# EAGLE board board1 (EAGLE 7.5.0)
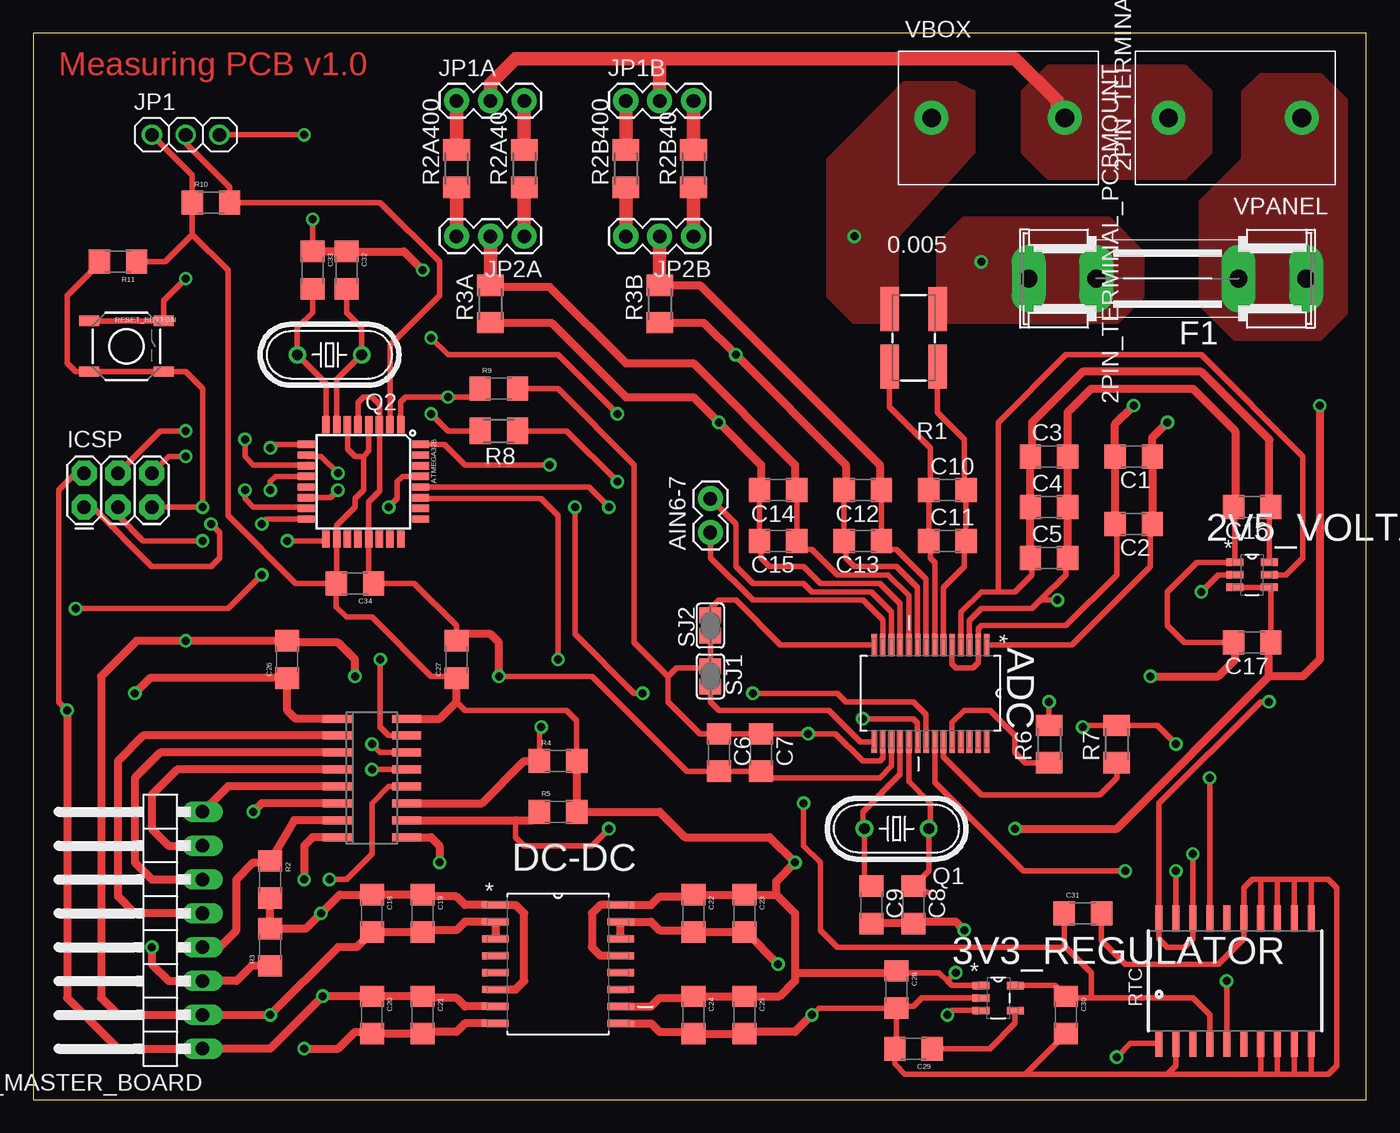
[diagram p0: board, top side]
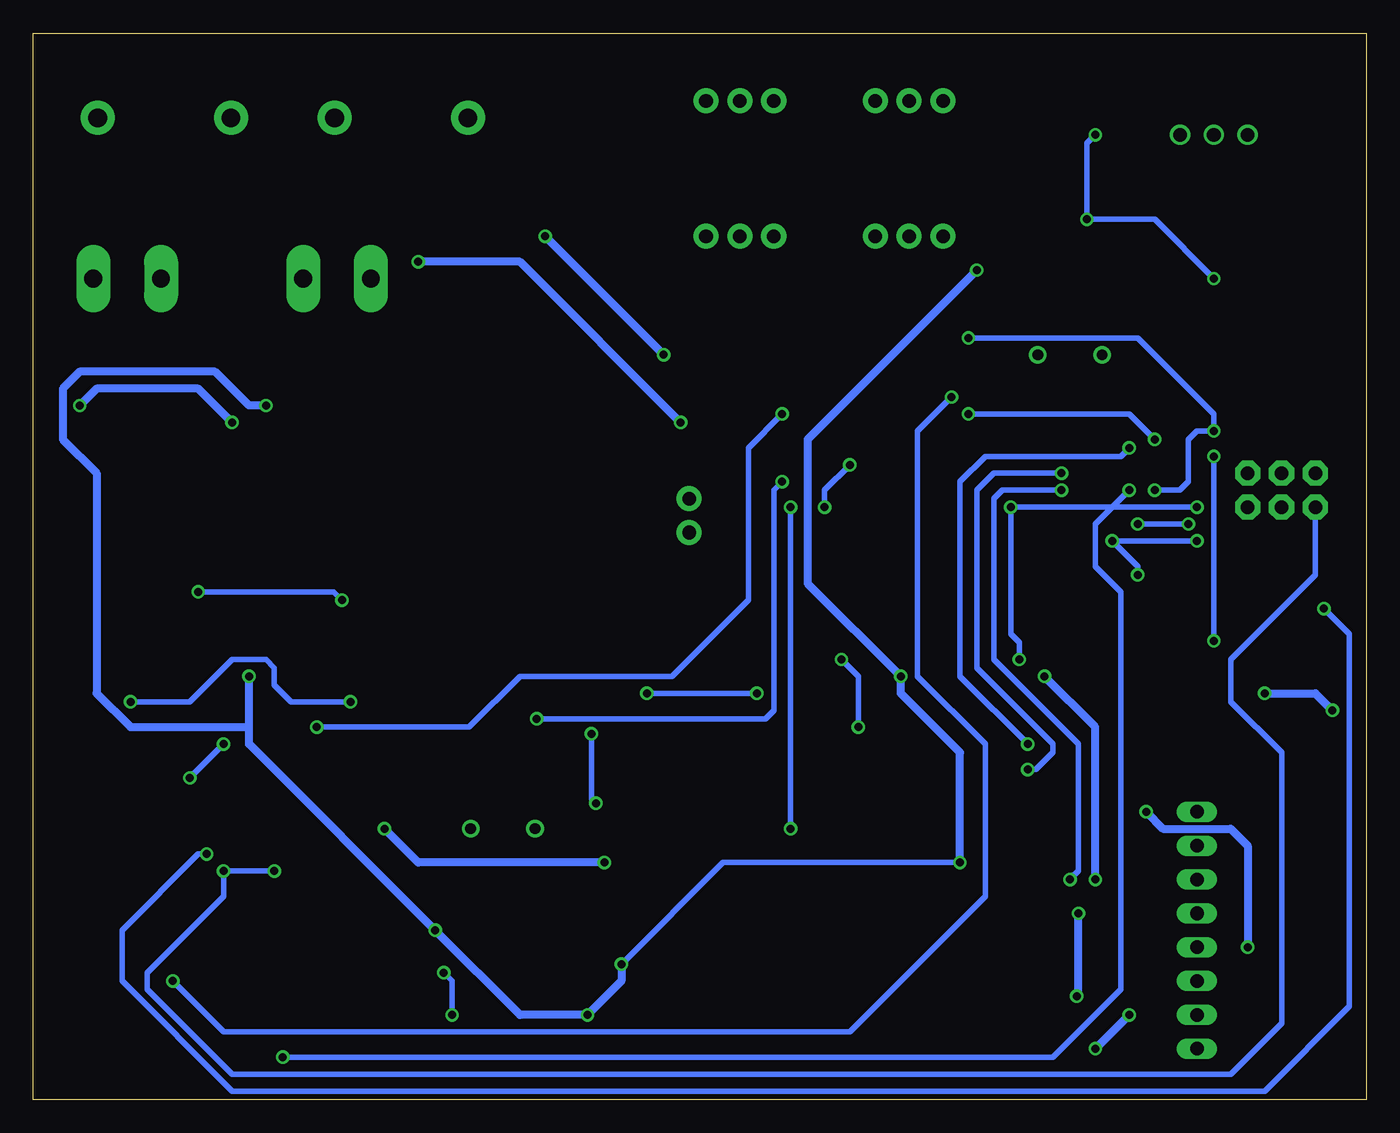
[diagram p1: board, bottom side, seen from below]

Size 100 x 80 mm. Coordinates in mm from the lower left corner, seen from the top.
Outline: 0,0 100,0 100,80 0,80 0,0
Copper layers (1*16): Top 0.035mm / dielectric 1.5mm / Bottom 0.035mm
Design rules "default": minimum track width 10mil, minimum drill 24mil, track to track 8mil, track to pad 8mil, pad to pad 8mil, via to via 8mil, smd to smd 8mil, copper to edge 40mil, drill to drill 8mil, minimum pad ring 10mil, minimum via ring 8mil, stop-mask expansion 4mil, vias tented up to drill 0mil, thermal gap 10mil

## Footprints (pad centres in the part's own frame; a part is rotated, then mirrored left to right if it is on the bottom)
SOT95P280X145-6N = smd 1.27 x 0.559: 1 -1.295,0.94; 2 -1.295,0; 3 -1.295,-0.94; 4 1.295,-0.94; 5 1.295,0; 6 1.295,0.94
SOT95P280X145-5N = smd 1.27 x 0.559: 1 -1.295,0.94; 2 -1.295,0; 3 -1.295,-0.94; 4 1.295,-0.94; 5 1.295,0.94
SOP65P780X200-28N = smd 1.651 x 0.432: 1 -3.632,4.216; 2 -3.632,3.581; 3 -3.632,2.921; 4 -3.632,2.286; 5 -3.632,1.626; 6 -3.632,0.965; 7 -3.632,0.33; 8 -3.632,-0.33; 9 -3.632,-0.965; 10 -3.632,-1.626; 11 -3.632,-2.286; 12 -3.632,-2.921; 13 -3.632,-3.581; 14 -3.632,-4.216; 15 3.632,-4.216; 16 3.632,-3.581; 17 3.632,-2.921; 18 3.632,-2.286; 19 3.632,-1.626; 20 3.632,-0.965; 21 3.632,-0.33; 22 3.632,0.33; 23 3.632,0.965; 24 3.632,1.626; 25 3.632,2.286; 26 3.632,2.921; 27 3.632,3.581; 28 3.632,4.216
1X02 = drill 1.016 pad 1.88: 1 0,0; 2 2.54,0
TQFP32-08 = smd 1.27 x 0.559: 1 -4.293,2.8; 2 -4.293,2; 3 -4.293,1.2; 4 -4.293,0.4; 5 -4.293,-0.4; 6 -4.293,-1.2; 7 -4.293,-2; 8 -4.293,-2.8; 17 4.293,-2.8; 18 4.293,-2; 19 4.293,-1.2; 20 4.293,-0.4; 21 4.293,0.4; 22 4.293,1.2; 23 4.293,2; 24 4.293,2.8 | smd 0.559 x 1.27: 9 -2.8,-4.293; 10 -2,-4.293; 11 -1.2,-4.293; 12 -0.4,-4.293; 13 0.4,-4.293; 14 1.2,-4.293; 15 2,-4.293; 16 2.8,-4.293; 25 2.8,4.293; 26 2,4.293; 27 1.2,4.293; 28 0.4,4.293; 29 -0.4,4.293; 30 -1.2,4.293; 31 -2,4.293; 32 -2.8,4.293
C3216 = smd 1.6 x 1.8: 1 -1.4,0; 2 1.4,0
1206 = smd 1.6 x 1.8: 1 -1.4,0; 2 1.4,0
SOIC127P1032X265-16N = smd 1.981 x 0.533: 1 -4.699,4.445; 2 -4.699,3.175; 3 -4.699,1.905; 4 -4.699,0.635; 5 -4.699,-0.635; 6 -4.699,-1.905; 7 -4.699,-3.175; 8 -4.699,-4.445; 9 4.699,-4.445; 10 4.699,-3.175; 11 4.699,-1.905; 12 4.699,-0.635; 13 4.699,0.635; 14 4.699,1.905; 15 4.699,3.175; 16 4.699,4.445
SHK20L = drill 1.321 pad 2.54 long: 1A -10.414,0; 1B -5.334,0; 2A 10.414,0; 2B 5.334,0
2X3 = drill 1.016 pad 1.88 octagon: 1 0,0; 2 0,2.54; 3 2.54,0; 4 2.54,2.54; 5 5.08,0; 6 5.08,2.54
1X03 = drill 1.016: 1 -2.54,0; 2 0,0; 3 2.54,0
1X03' = drill 1.016 pad 1.88: 1 0,0; 2 2.54,0; 3 5.08,0
HC49U-V = drill 0.813: 1 -2.413,0; 2 2.413,0
LVK25 = smd 1.4 x 3.3: INI -1.8,-2.15; INV -1.8,2.15; OUTI 1.8,-2.15; OUTV 1.8,2.15
M3216 = smd 1.6 x 2: 1 -1.4,0; 2 1.4,0
TACTILE-SWITCH-SMD = smd 1.524 x 0.762: 1 -2.794,1.905; 2 2.794,1.905; 3 -2.794,-1.905; 4 2.794,-1.905
DS3234 = smd 0.53 x 1.98: 1 -5.715,-4.685; 2 -4.445,-4.685; 3 -3.175,-4.685; 4 -1.905,-4.685; 5 -0.635,-4.685; 6 0.635,-4.685; 7 1.905,-4.685; 8 3.175,-4.685; 9 4.445,-4.685; 10 5.715,-4.685; 11 5.715,4.685; 12 4.445,4.685; 13 3.175,4.685; 14 1.905,4.685; 15 0.635,4.685; 16 -0.635,4.685; 17 -1.905,4.685; 18 -3.175,4.685; 19 -4.445,4.685; 20 -5.715,4.685
SOIC-16 = smd 0.6 x 2.2: 1 -4.445,-2.6; 2 -3.175,-2.6; 3 -1.905,-2.6; 4 -0.635,-2.6; 5 0.635,-2.6; 6 1.905,-2.6; 7 3.175,-2.6; 8 4.445,-2.6; 9 4.445,2.6; 10 3.175,2.6; 11 1.905,2.6; 12 0.635,2.6; 13 -0.635,2.6; 14 -1.905,2.6; 15 -3.175,2.6; 16 -4.445,2.6
SJ = smd 1.168 x 1.6: 1 -0.762,0; 2 0.762,0
1X08/90 = drill 1.016 long: 1 -8.89,-3.81; 2 -6.35,-3.81; 3 -3.81,-3.81; 4 -1.27,-3.81; 5 1.27,-3.81; 6 3.81,-3.81; 7 6.35,-3.81; 8 8.89,-3.81
2TERMINALBLOCK_10MMPITCH = drill 1.4 pad 2.54: 1 5,0; 2 -5,0

## Placement (x,y rotation side)
2V5_VOLTAGE_REF  ADR3425ARJZ-R7  [SOT95P280X145-6N]  91.44,39.37 0 top
3V3_REGULATOR  LP2985-33DBVT  [SOT95P280X145-5N]  72.39,7.62 0 top
ADC  ADS1256IDBT  [SOP65P780X200-28N]  67.31,30.48 270 top
AIN6-7  [1X02]  50.8,42.55 90 top
ATMEGA328  ATMEGA328P_TQFP  [TQFP32-08]  24.77,46.35 270 top
C1  10u  [C3216]  82.55,48.26 180 top
C2  0.1u  [C3216]  82.55,43.18 180 top
C3  47u  [C3216]  76.2,48.26 0 top
C4  0.1u  [C3216]  76.2,44.45 0 top
C5  100p  [C3216]  76.2,40.64 0 top
C6  10u  [C3216]  51.44,26.04 270 top
C7  0.1u  [C3216]  54.61,26.04 270 top
C8  18p  [C3216]  66.04,14.61 270 top
C9  18p  [C3216]  62.87,14.61 270 top
C10  0.1u  [C3216]  68.58,45.72 0 top
C11  100p  [C3216]  68.58,41.91 0 top
C12  0.1u  [C3216]  62.23,45.72 180 top
C13  100p  [C3216]  62.23,41.91 180 top
C14  0.1u  [C3216]  55.88,45.72 180 top
C15  100p  [C3216]  55.88,41.91 180 top
C16  0.1u  [C3216]  91.44,44.45 180 top
C17  0.1u  [C3216]  91.44,34.29 180 top
C18  10u  [1206]  25.4,13.97 270 top
C19  0.1u  [1206]  29.21,13.97 270 top
C20  10u  [1206]  25.4,6.35 270 top
C21  0.1u  [1206]  29.21,6.35 270 top
C22  0.1u  [1206]  49.53,13.97 270 top
C23  10u  [1206]  53.34,13.97 270 top
C24  0.1u  [1206]  49.53,6.35 270 top
C25  10u  [1206]  53.34,6.35 270 top
C26  0.1u  [1206]  19.05,33.02 90 top
C27  0.1u  [1206]  31.75,33.02 90 top
C28  1u  [1206]  64.77,8.26 270 top
C29  10n  [1206]  66.04,3.81 180 top
C30  2.2u  [1206]  77.47,6.35 270 top
C31  22p  [1206]  78.74,13.97 0 top
C32  22p  [1206]  23.5,62.23 270 top
C33  22p  [1206]  20.95,62.23 270 top
C34  22p  [1206]  24.13,38.73 180 top
DC-DC  ADUM5000ARWZ  [SOIC127P1032X265-16N]  39.37,10.16 0 top
F1  15A  [SHK20L]  85.09,61.59 180 top
ICSP  FEMALE 2x3  [2X3]  3.81,44.45 0 top
JP1  [1X03]  11.43,72.39 0 top
JP1A  [1X03']  31.75,74.93 0 top
JP1B  [1X03']  44.45,74.93 0 top
JP2A  [1X03']  36.83,64.77 180 top
JP2B  [1X03']  49.53,64.77 180 top
Q1  7.68M  [HC49U-V]  64.77,20.32 180 top
Q2  16MHz  [HC49U-V]  22.23,55.88 180 top
R1  0.005  [LVK25]  66.04,57.15 180 top
R2  4.7k  [1206]  17.78,16.51 270 top
R2A40  560k  [M3216]  36.83,69.85 90 top
R2A400  5.49M  [M3216]  31.75,69.85 90 top
R2B40  560k  [M3216]  49.53,69.85 90 top
R2B400  5.49M  [M3216]  44.45,69.85 90 top
R3  4.7k  [1206]  17.78,11.43 90 top
R3A  1k  [M3216]  34.29,59.69 90 top
R3B  1k  [M3216]  46.99,59.69 90 top
R4  4.7k  [1206]  39.37,25.4 0 top
R5  4.7k  [1206]  39.37,21.59 0 top
R6  100  [M3216]  76.2,26.67 90 top
R7  100  [M3216]  81.28,26.67 90 top
R8  100  [M3216]  34.92,50.16 180 top
R9  10k  [1206]  34.92,53.34 0 top
R10  4.7k  [1206]  13.34,67.31 0 top
R11  10k  [1206]  6.35,62.87 180 top
RESET_BUTTON  TAC_SWITCHSMD  [TACTILE-SWITCH-SMD]  6.99,56.52 0 top
RTC  DS3234  [DS3234]  90.17,8.89 0 top
SIGNAL_ISOLATOR  IC_DIL16-SOIC-16  [SOIC-16]  25.4,24.13 270 top
SJ1  [SJ]  50.8,31.75 270 top
SJ2  [SJ]  50.8,35.56 90 top
TO_MASTER_BOARD  [1X08/90]  8.89,12.7 90 top
VBOX  2PIN_TERMINAL_PCBMOUNT  [2TERMINALBLOCK_10MMPITCH]  72.39,73.66 0 top
VPANEL  2PIN_TERMINAL_PCBMOUNT  [2TERMINALBLOCK_10MMPITCH]  90.17,73.66 180 top

## Library data of the parts
2V5_VOLTAGE_REF = Analog Devices_By_element14_Batch_1; MPN: ADR3425ARJZ-R7; OC_FARNELL: 1827384; OC_NEWARK: 67R2201; PACKAGE: SOT-23-6; SUPPLIER: Analog Devices
3V3_REGULATOR = Texas Instruments_By_element14_Batch_1; MPN: LP2985-33DBVT; OC_FARNELL: -; OC_NEWARK: 43J9347; PACKAGE: SOT-23-5; SUPPLIER: Texas Instruments
ADC = Texas Instruments_By_element14_Batch_1; MPN: ADS1256IDBT; OC_FARNELL: 1470337; OC_NEWARK: 73H4119; PACKAGE: SSOP-28; SUPPLIER: TEXAS INSTRUMENTS
AIN6-7 JP1A JP1B JP2A JP2B = SparkFun-Connectors
ATMEGA328 = SparkFun-DigitalIC; PROD_ID: IC-09069
C1-C17 JP1 R2A40 R2A400 R2B40 R2B400 R3A R3B R6-R8 = adafruit
C18-C34 = SparkFun-Capacitors
DC-DC = Analog Devices_By_element14_Batch_1; MPN: ADUM5000ARWZ; OC_FARNELL: 1701256; OC_NEWARK: 19P8235; PACKAGE: SOIC-16; SUPPLIER: Analog Devices
F1 = fuse; OC_FARNELL: unknown; OC_NEWARK: unknown
ICSP = SparkFun-Connectors; PROD_ID: CONN-11566
Q1 Q2 = adafruit; OC_FARNELL: 1666969; OC_NEWARK: unknown
R1 = LVK25
R2-R5 R9-R11 = SparkFun-Passives
RESET_BUTTON = SparkFun-Retired; PROD_ID: SWCH-08247
RTC = SparkFun-FreqCtrl
SIGNAL_ISOLATOR = MAX14850ASE
SJ1 SJ2 = jumper
TO_MASTER_BOARD = pinhead
VBOX VPANEL = TE CONNECTIVITY

## Nets
1WIRE_BUS: ATMEGA328.2 JP1.2 R10.2
3V3: 3V3_REGULATOR.5 ADC.16 C6.1 C7.1 C30.1 C31.1 R9.2 RTC.4 SJ1.1 SJ2.1
5V: C18.1 C19.1 C20.1 C21.1 C26.1 DC-DC.1 DC-DC.6 DC-DC.7 ICSP.2 R2.2 R3.2 SIGNAL_ISOLATOR.1 TO_MASTER_BOARD.1
5V_ISO: 2V5_VOLTAGE_REF.3 2V5_VOLTAGE_REF.4 3V3_REGULATOR.1 3V3_REGULATOR.3 ADC.1 ATMEGA328.4 ATMEGA328.6 ATMEGA328.18 C1.1 C2.1 C17.1 C22.1 C23.1 C24.1 C25.1 C27.1 C28.1 C34.2 DC-DC.10 DC-DC.13 DC-DC.16 JP1.1 R4.2 R5.2 R10.1 R11.1 SIGNAL_ISOLATOR.16
ADC_CS: ATMEGA328.11 R8.2
ADC_DRDY: ADC.21 ATMEGA328.32
AIN0: ADC.6 C10.2 C11.2 R1.INV
AIN1: ADC.7 C10.1 C11.1 R1.OUTV
AIN2: ADC.8 C12.1 C13.1 JP2B.2 R3B.2
AIN3: ADC.9 C12.2 C13.2 R1.OUTI R3B.1 VBOX.2
AIN4: ADC.10 C14.1 C15.1 JP2A.2 R3A.2
AIN5: ADC.11 C14.2 C15.2 F1.2A F1.2B R1.INI R3A.1
GND: C18.2 C19.2 C20.2 C21.2 C26.2 DC-DC.2 DC-DC.3 DC-DC.8 ICSP.6 SIGNAL_ISOLATOR.8 TO_MASTER_BOARD.2
GND_ISO: 2V5_VOLTAGE_REF.1 2V5_VOLTAGE_REF.2 3V3_REGULATOR.2 ADC.2 ADC.3 ADC.5 ADC.17 ATMEGA328.3 ATMEGA328.5 ATMEGA328.21 C1.2 C2.2 C3.2 C4.2 C5.2 C6.2 C7.2 C8.2 C9.2 C16.2 C17.2 C22.2 C23.2 C24.2 C25.2 C27.2 C28.2 C29.2 C30.2 C31.2 C32.1 C33.1 C34.1 DC-DC.9 DC-DC.14 DC-DC.15 JP1.3 RESET_BUTTON.1 RESET_BUTTON.2 RTC.2 RTC.7 RTC.8 RTC.9 RTC.10 RTC.11 RTC.12 RTC.13 RTC.14 RTC.15 SIGNAL_ISOLATOR.9
IN1: SIGNAL_ISOLATOR.2 TO_MASTER_BOARD.5
IN2: SIGNAL_ISOLATOR.3 TO_MASTER_BOARD.6
IN2_ISO: ATMEGA328.9 SIGNAL_ISOLATOR.14
MISO: ADC.22 ATMEGA328.16 ICSP.1 RTC.19
MOSI: ATMEGA328.15 ICSP.4 R7.2 RTC.17
N$1: ADC.24 R6.1
N$2: JP1A.3 R2A40.2
N$3: JP1A.1 R2A400.2
N$4: JP2A.3 R2A400.1
N$5: JP2A.1 R2A40.1
N$6: ATMEGA328.8 C33.2 Q2.2
N$7: JP1B.3 R2B40.2
N$8: JP1B.1 R2B400.2
N$9: JP2B.3 R2B400.1
N$10: JP2B.1 R2B40.1
N$11: ADC.19 C8.1 Q1.1
N$12: ADC.18 C9.1 Q1.2
N$13: ATMEGA328.7 C32.2 Q2.1
N$14: ADC.23 R7.1
N$16: ADC.20 R8.1
N$17: ADC.15 SJ1.2
N$18: ADC.12 AIN6-7.2
N$19: ADC.13 AIN6-7.1
N$20: ADC.14 SJ2.2
N$21: 3V3_REGULATOR.4 C29.1
OUT1: SIGNAL_ISOLATOR.4 TO_MASTER_BOARD.7
OUT1_ISO: ATMEGA328.10 SIGNAL_ISOLATOR.13
OUT2: SIGNAL_ISOLATOR.5 TO_MASTER_BOARD.8
OUT2_ISO: ATMEGA328.14 SIGNAL_ISOLATOR.12
RESET: ATMEGA328.29 ICSP.5 R11.2 RESET_BUTTON.3 RESET_BUTTON.4 SIGNAL_ISOLATOR.15
RTC_CS: ATMEGA328.12 RTC.1
RTC_SQW: ATMEGA328.1 R9.1 RTC.5
SCL: R2.1 SIGNAL_ISOLATOR.7 TO_MASTER_BOARD.4
SCL_ISO: ATMEGA328.28 R5.1 SIGNAL_ISOLATOR.10
SCLK: ATMEGA328.17 ICSP.3 R6.2 RTC.18 RTC.20
SDA: R3.1 SIGNAL_ISOLATOR.6 TO_MASTER_BOARD.3
SDA_ISO: ATMEGA328.27 R4.1 SIGNAL_ISOLATOR.11
VBUS1: JP1A.2 JP1B.2 VBOX.1 VPANEL.1
VBUS2: F1.1A F1.1B VPANEL.2
VREF_2V5: 2V5_VOLTAGE_REF.5 2V5_VOLTAGE_REF.6 ADC.4 C3.1 C4.1 C5.1 C16.1

## Tracks (layer width: path | path; a pad name or v marks a point on that pad's centre or on a via)
1WIRE_BUS
  Top 0.406: ATMEGA328.2 26.77,56.61 30.48,60.33 30.48,62.87 26.04,67.31 R10.2 14.73,68.45 11.43,71.75 JP1.2
3V3  (via drill 0.6)
  Top 0.406: SJ2.1 SJ1.1 50.67,32.38 48.26,32.38 47.62,31.75 | 3V3_REGULATOR.5 76.66,8.56 C30.1 77.6,7.62 79.38,7.62 | RTC.4 88.27,6.35 87,7.62 79.38,7.62 | 47.62,31.75 47.62,29.84 50.03,27.43 C6.1 C7.1 v58.12,27.43 60.2,27.43 62.23,25.4 63.5,25.4 63.73,25.63 ADC.16 | v57.78,22.23 57.78,19.05 59.05,17.78 59.05,12.7 60.33,11.43 77.47,11.43 | 77.47,11.43 79.38,9.53 79.38,7.62 | R9.2 39.37,53.34 45.09,47.62 45.09,34.29 47.62,31.75 | C31.1 77.34,11.56 77.47,11.43
  Bottom 0.406: v58.12,27.43 58.12,22.56 v57.78,22.23
5V  (via drill 0.6)
  Top 0.406: ICSP.2 3.17,46.99 1.91,45.72 1.91,29.84 v2.54,29.21
  Top 0.61: DC-DC.6 36.2,8.26 36.83,8.89 36.83,13.97 36.2,14.61 DC-DC.1 32.38,14.61 31.75,15.24 29.34,15.24 C19.1 C18.1 22.99,15.37 v21.59,13.97 20.45,12.83 R3.2 R2.2 | DC-DC.7 32.38,6.99 31.75,7.62 29.34,7.62 C21.1 C20.1 v21.72,7.75 17.78,3.81 TO_MASTER_BOARD.1 6.35,3.81 2.54,7.62 v2.54,29.21 | SIGNAL_ISOLATOR.1 19.68,28.57 19.05,29.21 C26.1 8.76,31.62 v7.62,30.48
  Bottom 0.61: v21.72,7.75 21.59,7.88 v21.59,13.97 | v7.62,30.48 3.81,30.48 v2.54,29.21
5V_ISO  (via drill 0.6)
  Top 0.406: 2V5_VOLTAGE_REF.3 2V5_VOLTAGE_REF.4 92.84,38.33 C17.1 | ATMEGA328.6 23.57,48.83 24.13,48.26 24.77,48.26 | ATMEGA328.4 25.16,48.66 24.77,48.26 | 3V3_REGULATOR.1 68.91,8.56 68.58,8.89 | 68.58,8.89 67.94,9.53 64.9,9.53 C28.1 | 3V3_REGULATOR.3 68.91,6.68 v68.58,6.35 | v69.22,9.53 68.58,8.89 | R4.2 40.77,28.45 40.01,29.21 32.38,29.21 31.75,29.84 | C34.2 22.77,38.77 ATMEGA328.18 22.77,43.09 24.13,44.45 24.13,45.09 24.77,45.72 24.77,48.26 | C34.2 22.73,36.96 23.5,36.2 25.4,36.2 29.84,31.75 31.62,31.75 C27.1 | JP1.1 11.94,69.34 R10.1 11.94,64.9 | 11.94,64.9 14.61,62.23 14.61,43.81 19.68,38.73 C34.2 | R11.1 9.9,62.87 11.94,64.9 | ADC.1 77.93,34.11 83.82,40.01 83.82,43.05 C2.1
  Top 0.61: DC-DC.13 42.55,10.79 41.91,11.43 41.91,13.97 42.55,14.61 DC-DC.16 46.35,14.61 46.99,15.24 49.4,15.24 C22.1 C23.1 55.75,15.37 | DC-DC.10 46.35,6.99 46.99,7.62 49.4,7.62 C24.1 C25.1 56.01,7.75 57.15,8.89 57.15,9.53 | 55.75,15.37 57.15,13.97 57.15,9.53 | 55.75,15.37 55.75,16.38 v57.15,17.78 55.24,19.68 48.9,19.68 46.99,21.59 R5.2 R4.2 | 92.71,31.75 92.71,34.16 C17.1 | v96.52,52.07 96.52,33.02 95.25,31.75 92.71,31.75 | v85.09,50.8 83.95,49.66 C1.1 C2.1 | SIGNAL_ISOLATOR.16 30.48,28.57 31.75,29.84 C27.1 | 57.15,9.53 64.64,9.53 C28.1 | v73.66,20.32 81.28,20.32 92.71,31.75
  Bottom 0.406: v68.58,6.35 68.58,8.89 v69.22,9.53
  Bottom 0.61: v57.15,17.78 71.12,17.78 v73.66,20.32 | v85.09,50.8 87.63,53.34 95.25,53.34 v96.52,52.07
ADC_CS  (via drill 0.6)
  Top 0.406: R8.2 31.11,50.16 v29.84,51.44 | v15.88,49.53 15.88,48.26 16.51,47.62 20.4,47.62 ATMEGA328.11
  Bottom 0.406: v29.84,51.44 17.78,51.44 v15.88,49.53
ADC_DRDY  (via drill 0.6)
  Top 0.406: ADC.21 66.98,28.91 66.04,29.84 60.96,29.84 60.33,30.48 v53.98,30.48 | v45.72,30.48 45.09,30.48 40.64,34.92 v40.64,44.45 | v38.73,47.62 32.38,47.62 30.86,49.16 ATMEGA328.32
  Bottom 0.406: v53.98,30.48 v45.72,30.48 | v40.64,44.45 40.64,45.72 v38.73,47.62
AIN0
  Top 0.406: ADC.6 68.28,38.43 69.85,40.01 69.85,41.78 C11.2 C10.2 69.85,45.85 69.85,49.53 67.84,51.54 R1.INV
AIN1
  Top 0.406: ADC.7 67.64,40.31 67.31,40.64 67.31,41.78 C11.1 C10.1 67.31,45.85 67.31,48.9 64.24,51.97 R1.OUTV
AIN2
  Top 0.406: ADC.8 66.98,39.06 64.77,41.27 64.27,41.27 C13.1 C12.1
  Top 0.61: R3B.2 50.03,61.09 63.5,47.62 63.5,45.85 C12.1
  Top 1.016: JP2B.2 R3B.2
AIN3  (via drill 0.6)
  Top 0.406: ADC.9 66.34,38.43 64.77,40.01 61.59,40.01 60.96,40.64 60.96,41.78 C13.2 C12.2
  Top 0.61: R3B.1 50.3,58.29 v52.7,55.88 60.96,47.62 60.96,45.85 C12.2
  Bottom 0.61: v52.7,55.88 v61.59,64.77
  pour Top (no thermals): 65.41,76.2 69.22,76.2 70.48,75.56 70.48,71.12 64.77,64.77 64.77,58.42 61.59,58.42 59.69,60.33 59.69,70.48
AIN4
  Top 0.406: ADC.10 65.68,37.82 64.14,39.37 60.33,39.37 58.42,41.27 57.91,41.27 C15.1 C14.1
  Top 0.61: C14.1 57.15,45.85 57.15,47.62 49.53,55.24 44.45,55.24 38.73,60.96 34.42,60.96 R3A.2
  Top 1.016: R3A.2 JP2A.2
AIN5  (via drill 0.6)
  Top 0.406: ADC.11 65.02,37.21 63.5,38.73 59.05,38.73 57.78,40.01 55.24,40.01 54.61,40.64 54.61,41.78 C15.2 54.61,42.04 54.61,42.55 54.48,42.67 C14.2
  Top 0.61: R3A.1 38.87,58.29 44.45,52.7 49.53,52.7 v51.44,50.8 54.61,47.62 54.61,45.85 C14.2
  Bottom 0.61: v51.44,50.8 63.5,62.87 v71.12,62.87
  pour Top (no thermals): 67.94,58.42 81.28,58.42 83.19,60.33 83.19,63.5 80.64,66.04 69.85,66.04 67.94,64.14
GND  (via drill 0.6)
  Top 0.406: v11.43,48.26 10.16,48.26 ICSP.6
  Top 0.61: DC-DC.8 32.38,5.71 31.75,5.08 29.34,5.08 C21.2 C20.2 25.27,5.08 24.13,5.08 22.86,3.81 v20.32,3.81 | DC-DC.3 DC-DC.2 32.38,13.34 31.75,12.7 29.34,12.7 C19.2 C18.2 24.26,11.43 22.86,11.43 v17.78,6.35 TO_MASTER_BOARD.2 6.35,6.35 5.08,7.62 5.08,31.75 7.75,34.42 v11.43,34.42 C26.2 19.18,34.29 22.86,34.29 24.13,33.02 v24.13,31.75 | SIGNAL_ISOLATOR.8 20.95,19.68 20.32,19.05 v20.32,16.51
  Bottom 0.406: v11.43,34.42 v11.43,48.26
  Bottom 0.61: v17.78,6.35 v20.32,3.81 | v20.32,16.51 20.32,27.94 v24.13,31.75
GND_ISO  (via drill 0.6)
  Top 0.406: C16.2 90.14,44.34 2V5_VOLTAGE_REF.1 87.3,40.31 85.09,38.1 85.09,35.56 86.36,34.29 C17.2 | 2V5_VOLTAGE_REF.2 88.9,39.37 v87.63,38.1 | C2.2 81.28,43.05 81.28,39.37 77.47,35.56 71.12,35.56 70.89,35.33 ADC.2 70.89,32.79 70.48,32.38 69.22,32.38 68.94,32.66 ADC.5 | ADC.3 70.23,35.94 71.12,36.83 74.93,36.83 75.56,37.47 | 75.56,37.47 77.47,39.37 77.47,40.51 C5.2 | v76.83,37.47 75.56,37.47 | 3V3_REGULATOR.2 66.67,7.62 66.04,6.99 64.9,6.99 C28.2 | C28.2 64.77,3.94 C29.2 64.64,2.67 65.41,1.91 74.42,1.91 | 74.42,1.91 C30.2 | RTC.2 85.72,2.54 85.09,1.91 | 85.09,1.91 74.42,1.91 | RTC.8 93.34,1.91 | 93.34,1.91 92.08,1.91 | 92.08,1.91 85.09,1.91 | RTC.14 92.08,16.51 | RTC.13 93.34,16.51 | RTC.12 94.61,16.51 | RTC.11 95.89,16.51 | 92.08,16.51 93.34,16.51 | 93.34,16.51 94.61,16.51 | 94.61,16.51 95.89,16.51 | 95.89,16.51 97.16,16.51 97.79,15.88 97.79,2.54 97.16,1.91 95.89,1.91 | 95.89,1.91 94.61,1.91 | RTC.10 95.89,1.91 | RTC.9 94.61,1.91 | 94.61,1.91 93.34,1.91 | RTC.7 92.08,1.91 | v34.92,31.75 41.91,31.75 49.02,24.64 C6.2 C7.2 55.12,24.13 63.5,24.13 64.39,25.02 ADC.17 | ATMEGA328.5 24.36,52.3 24.77,52.7 25.4,52.7 25.96,52.14 ATMEGA328.3 25.96,45.65 25.16,44.85 ATMEGA328.21 25.16,39.1 C34.1 28.57,38.73 31.75,35.56 C27.2 | C33.1 v20.95,66.04 | v20.32,72.39 JP1.3 | RESET_BUTTON.1 RESET_BUTTON.2 9.78,59.94 v11.43,61.59 | C31.2 80.14,11.94 81.92,10.16 88.9,10.16 90.81,12.06 RTC.15 90.81,15.88 91.44,16.51 92.08,16.51 | C28.2 58.92,6.86 v58.42,6.35
  Top 0.61: DC-DC.14 DC-DC.15 46.35,13.34 46.99,12.7 49.4,12.7 C22.2 C23.2 53.47,12.57 v55.88,10.16 | DC-DC.9 46.35,5.71 46.99,5.08 49.4,5.08 C24.2 C25.2 53.47,5.08 57.15,5.08 v58.42,6.35 | v83.82,31.75 88.9,31.75 90.17,33.02 90.17,34.16 C17.2 | v82.55,52.07 81.15,50.67 C1.2 C2.2 | C16.2 90.17,44.58 90.17,50.16 87,53.34 79.38,53.34 77.6,51.56 C3.2 C4.2 C5.2 | SIGNAL_ISOLATOR.9 29.84,19.68 30.48,19.05 v30.48,17.78 | v34.92,31.75 34.92,34.29 34.29,34.92 32.26,34.92 C27.2 | C33.1 C32.1 27.81,63.63 v29.21,62.23 | C9.2 C8.2 66.17,13.34 69.22,13.34 v69.85,12.7
  Bottom 0.406: v87.63,38.1 77.47,38.1 v76.83,37.47 | v30.48,17.78 48.26,17.78 v55.88,10.16 | v20.32,72.39 20.95,71.75 v20.95,66.04 15.88,66.04 v11.43,61.59
  Bottom 0.61: v55.88,10.16 55.88,8.89 v58.42,6.35 63.5,6.35 v69.85,12.7 83.82,26.67 83.82,27.94 | 83.82,27.94 v83.82,31.75 | 83.82,27.94 92.71,27.94 95.25,30.48 95.25,46.99 97.79,49.53 97.79,53.34 96.52,54.61 86.36,54.61 83.82,52.07 v82.55,52.07 | v30.48,17.78 30.48,26.04 34.92,30.48 v34.92,31.75 41.91,38.73 41.91,49.53 v29.21,62.23
IN1
  Top 0.61: TO_MASTER_BOARD.5 7.62,13.97 6.35,15.24 6.35,25.4 8.26,27.3 SIGNAL_ISOLATOR.2
IN2
  Top 0.61: SIGNAL_ISOLATOR.3 9.53,26.04 7.62,24.13 7.62,17.78 8.89,16.51 TO_MASTER_BOARD.6
IN2_ISO  (via drill 0.6)
  Top 0.406: SIGNAL_ISOLATOR.14 26.04,26.04 v25.4,26.67 | ATMEGA328.9 18.04,49.16 v17.78,48.9
  Bottom 0.406: v25.4,26.67 30.48,31.75 30.48,46.35 28.57,48.26 18.41,48.26 v17.78,48.9
MISO  (via drill 0.6)
  Top 0.406: ICSP.1 4.45,44.45 8.89,40.01 13.34,40.01 13.97,40.64 13.97,42.55 v13.34,43.18 | ATMEGA328.16 17.52,43.55 v17.14,43.18 | ADC.22 67.64,23.8 74.3,17.14 v81.92,17.14 | v85.72,17.14 RTC.19
  Bottom 0.406: v17.14,43.18 v13.34,43.18 | v81.92,17.14 v85.72,17.14 85.72,15.24 91.44,9.53 91.44,8.26 85.09,1.91 10.16,1.91 6.35,5.71 6.35,26.04 10.16,29.84 10.16,33.02 3.81,39.37 ICSP.1
MOSI  (via drill 0.6)
  Top 0.406: ICSP.4 9.53,50.16 v11.43,50.16 | v15.88,45.72 15.88,45.09 16.51,44.45 20.32,44.45 20.41,44.35 ATMEGA328.15 | v85.72,26.67 84.33,28.07 R7.2 78.87,28.07 v78.74,27.94 | v88.27,24.13 RTC.17 | v43.81,51.44 39.37,55.88 31.11,55.88 v29.84,57.15
  Bottom 0.406: v15.88,45.72 13.97,45.72 13.34,46.35 13.34,49.53 12.7,50.16 v11.43,50.16 11.43,51.44 17.14,57.15 v29.84,57.15 | v85.72,26.67 v88.27,24.13 | v78.74,27.94 67.31,27.94 63.5,31.75 52.07,31.75 46.35,37.47 46.35,48.9 v43.81,51.44
N$1
  Top 0.406: R6.1 74.42,25.27 73.66,26.04 73.66,27.3 71.75,29.21 69.85,29.21 68.94,28.3 ADC.24
N$2
  Top 1.016: JP1A.3 R2A40.2
N$3
  Top 1.016: JP1A.1 R2A400.2
N$4
  Top 1.016: R2A400.1 JP2A.3
N$5
  Top 1.016: JP2A.1 R2A40.1
N$6
  Top 0.406: ATMEGA328.8 21.96,53.73 Q2.2 19.81,57.91 20.95,59.05 C33.2
N$7
  Top 1.016: JP1B.3 R2B40.2
N$8
  Top 1.016: JP1B.1 R2B400.2
N$9
  Top 1.016: JP2B.3 R2B400.1
N$10
  Top 1.016: R2B40.1 JP2B.1
N$11
  Top 0.406: ADC.19 65.68,23.85 67.31,22.23 67.31,20.45 Q1.1 67.18,17.15 C8.1 67.18,15.5
N$12
  Top 0.406: ADC.18 65.02,24.38 62.23,21.59 62.23,20.45 Q1.2 62.36,16.51 C9.1 62.36,15.5
N$13
  Top 0.406: ATMEGA328.7 22.77,54.01 Q2.1 24.64,57.91 23.5,59.05 C32.2
N$14
  Top 0.406: ADC.23 68.28,25.7 71.12,22.86 80.01,22.86 81.28,24.13 R7.1
N$16  (via drill 0.6)
  Top 0.406: ADC.20 66.34,28.27 66.04,28.57 v62.23,28.57 | v43.81,46.35 40.01,50.16 R8.1
  Bottom 0.406: v62.23,28.57 45.09,28.57 44.45,29.21 44.45,45.72 v43.81,46.35
N$17
  Top 0.406: ADC.15 62.05,26.85 59.69,29.21 51.44,29.21 50.8,29.84 SJ1.2
N$18
  Top 0.406: ADC.12 64.39,36.58 62.87,38.1 58.42,38.1 57.78,38.73 53.98,38.73 52.7,40.01 52.7,43.18 AIN6-7.2
N$19
  Top 0.406: ADC.13 63.73,35.97 62.23,37.47 53.98,37.47 50.8,40.64 AIN6-7.1
N$20
  Top 0.406: ADC.14 56.06,34.11 52.7,37.47 51.44,37.47 50.8,36.83 SJ2.2
N$21
  Top 0.406: C29.1 71.75,3.81 73.66,5.71 73.66,6.66 3V3_REGULATOR.4
OUT1
  Top 0.61: SIGNAL_ISOLATOR.4 10.79,24.77 8.89,22.86 8.89,20.32 10.16,19.05 TO_MASTER_BOARD.7
OUT1_ISO  (via drill 0.6)
  Top 0.406: SIGNAL_ISOLATOR.13 v25.4,24.77 | v22.86,46.99 21.59,48.26 20.57,48.26 ATMEGA328.10
  Bottom 0.406: v25.4,24.77 24.77,24.77 23.5,26.04 23.5,26.67 29.21,32.38 29.21,45.72 27.94,46.99 v22.86,46.99
OUT2
  Top 0.61: SIGNAL_ISOLATOR.5 14.61,23.5 TO_MASTER_BOARD.8
OUT2_ISO  (via drill 0.6)
  Top 0.406: ATMEGA328.14 22.3,45.16 v22.86,45.72 | SIGNAL_ISOLATOR.12 26.67,23.5 25.4,22.23 25.4,18.41 23.5,16.51 v22.23,16.51
  Bottom 0.406: v22.86,45.72 27.3,45.72 27.94,45.09 27.94,33.02 21.59,26.67 21.59,17.14 v22.23,16.51
RESET  (via drill 0.6)
  Top 0.406: R11.2 4.95,62.73 2.54,60.33 2.54,55.24 3.17,54.61 RESET_BUTTON.3 RESET_BUTTON.4 11.43,54.61 12.7,53.34 v12.7,44.45 ICSP.5 | ATMEGA328.29 27.7,46.76 27.3,46.35 27.3,45.09 v26.67,44.45 | SIGNAL_ISOLATOR.15 26.67,27.3 26.04,27.94 v26.04,33.02
  Bottom 0.406: v12.7,44.45 v26.67,44.45 26.67,34.92 26.04,34.29 v26.04,33.02
RTC_CS  (via drill 0.6)
  Top 0.406: RTC.1 82.31,4.21 v81.28,3.17 | v17.78,45.72 17.78,46.35 18.18,46.76 ATMEGA328.12
  Bottom 0.406: v81.28,3.17 23.5,3.17 18.41,8.26 18.41,38.1 20.32,40.01 20.32,43.18 v17.78,45.72
RTC_SQW  (via drill 0.6)
  Top 0.406: ATMEGA328.1 27.57,52.33 27.94,52.7 v31.11,52.7 33.02,52.7 33.02,52.84 R9.1 | v89.53,8.89 RTC.5
  Bottom 0.406: v89.53,8.89 85.72,5.08 38.73,5.08 28.57,15.24 28.57,26.67 33.66,31.75 33.66,50.16 v31.11,52.7
SCL
  Top 0.61: SIGNAL_ISOLATOR.7 19.55,20.95 R2.1 17.65,17.78 16.51,17.78 15.24,16.51 15.24,12.7 13.97,11.43 TO_MASTER_BOARD.4
SCL_ISO  (via drill 0.6)
  Top 0.406: 36.2,20.95 36.2,19.68 36.83,19.05 41.91,19.05 v43.18,20.32 | ATMEGA328.28 41.67,45.95 v43.18,44.45
  Top 0.61: SIGNAL_ISOLATOR.10 36.2,20.95 37.47,20.95 37.47,21.09 R5.1
  Bottom 0.406: v43.18,44.45 v43.18,20.32
SCLK  (via drill 0.6)
  Top 0.406: ICSP.3 6.35,43.81 8.26,41.91 v12.7,41.91 | v19.05,41.91 21.81,41.91 ATMEGA328.17 | v92.71,29.84 92.08,29.84 84.45,22.23 RTC.20 84.45,12.06 85.09,11.43 86.36,11.43 87,12.06 RTC.18 v87,18.41 | R6.2 v76.2,29.84 | v3.17,36.83 14.61,36.83 v17.14,39.37
  Bottom 0.406: v12.7,41.91 v19.05,41.91 17.14,40.01 v17.14,39.37 | v92.71,29.84 88.27,29.84 85.09,33.02 82.55,33.02 81.92,32.38 81.92,31.11 80.64,29.84 v76.2,29.84 | v87,18.41 87.63,18.41 93.34,12.7 93.34,8.89 85.09,0.64 7.62,0.64 1.27,6.99 1.27,34.92 v3.17,36.83
SDA  (via drill 0.6)
  Top 0.61: R3.1 16.38,10.03 15.24,8.89 TO_MASTER_BOARD.3 10.16,8.89 8.89,10.16 v8.89,11.43 | SIGNAL_ISOLATOR.6 17.14,22.23 v16.51,21.59
  Bottom 0.61: v16.51,21.59 15.24,20.32 10.16,20.32 8.89,19.05 v8.89,11.43
SDA_ISO  (via drill 0.6)
  Top 0.406: R4.1 37.97,27.81 v38.1,27.94 | v39.37,33.02 39.37,43.81 38.1,45.09 29.13,45.09 ATMEGA328.27
  Top 0.61: SIGNAL_ISOLATOR.11 33.66,22.23 36.83,25.4 R4.1
  Bottom 0.406: v38.1,27.94 38.1,31.75 v39.37,33.02
VBUS1
  Top 1.016: JP1A.2 34.29,76.2 36.2,78.11 46.99,78.11 | JP1B.2 46.99,78.11 | 46.99,78.11 73.66,78.11 76.83,74.93 76.83,74.22 VBOX.1
  pour Top (no thermals): 88.27,73.66 88.27,71.12 86.36,69.22 76.2,69.22 74.3,71.12 74.3,75.56 76.2,77.47 86.36,77.47 88.27,75.56
VBUS2
  pour Top (no thermals): 92.08,76.83 96.52,76.83 98.42,74.93 98.42,59.05 96.52,57.15 90.17,57.15 87.63,59.69 87.63,67.31 90.81,70.48 90.81,75.56
VREF_2V5
  Top 0.406: 2V5_VOLTAGE_REF.6 92.73,44.34 C16.1 | ADC.4 69.6,36.58 71.12,38.1 72.39,38.1 | 72.39,38.1 73.66,38.1 74.93,39.37 74.93,40.51 C5.1 | 2V5_VOLTAGE_REF.5 93.98,39.37 95.25,40.64 95.25,48.26 87.63,55.88 77.47,55.88 72.39,50.8 72.39,38.1
  Top 0.61: 92.73,44.34 92.73,49.51 87.63,54.61 78.74,54.61 74.93,50.8 74.93,48.39 C3.1 C4.1 C5.1

## Text on the board
Top: Measuring PCB v1.0